# Altium PCB Main_Board.PcbDoc
Units mm, origin at the board's own origin, x right, y up, seen from the top; angles counter-clockwise.
Board outline 100 x 100 mm, 2 copper layers (Top Layer, Bottom Layer); 60 components, 76 nets, 295 pads, 66 vias.
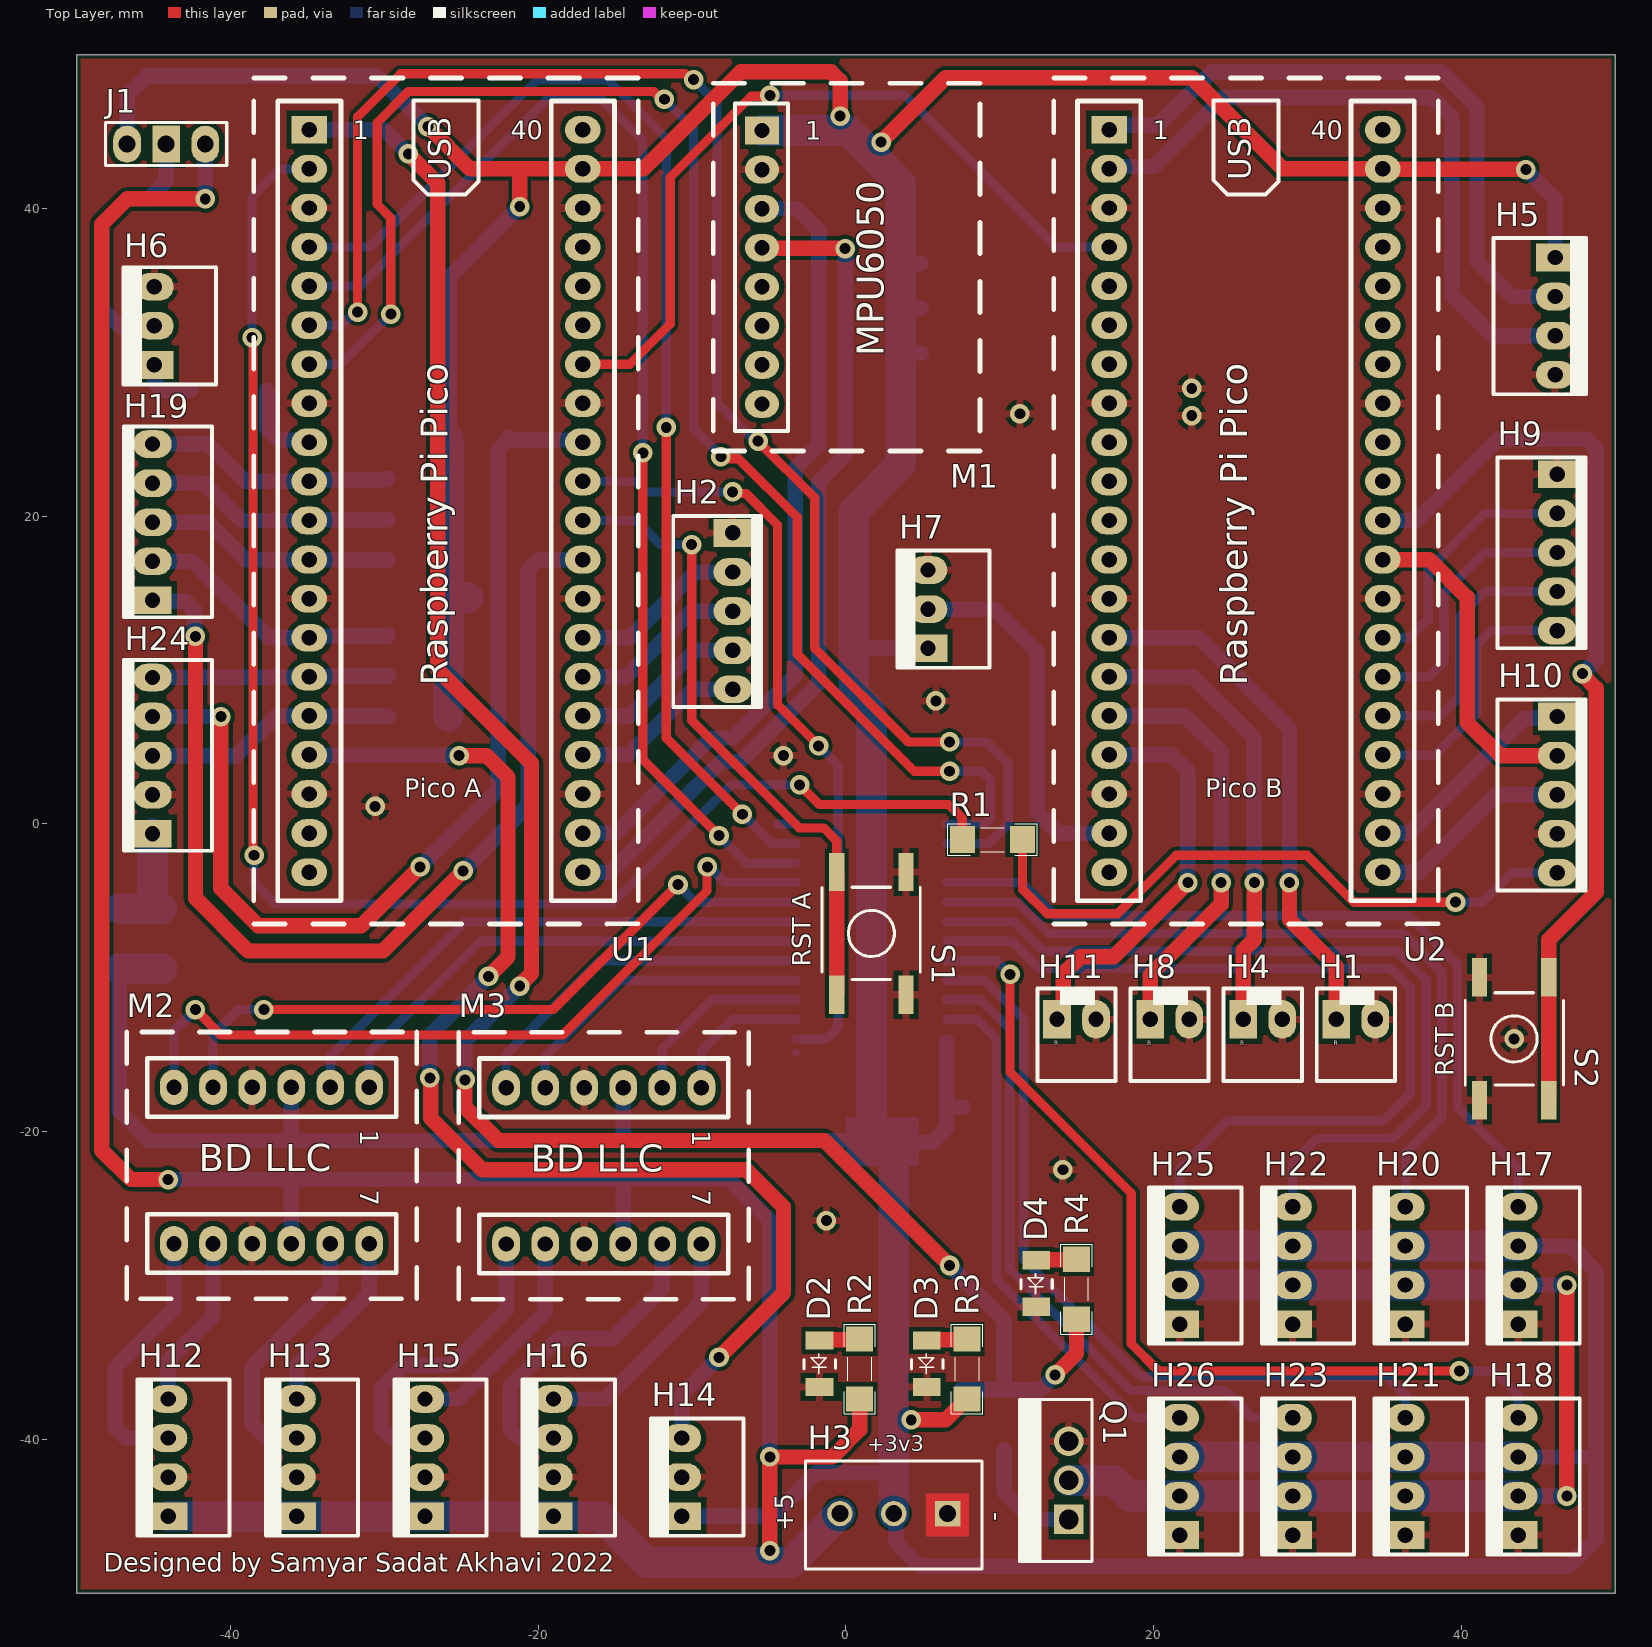
[diagram p0: Top Layer view]
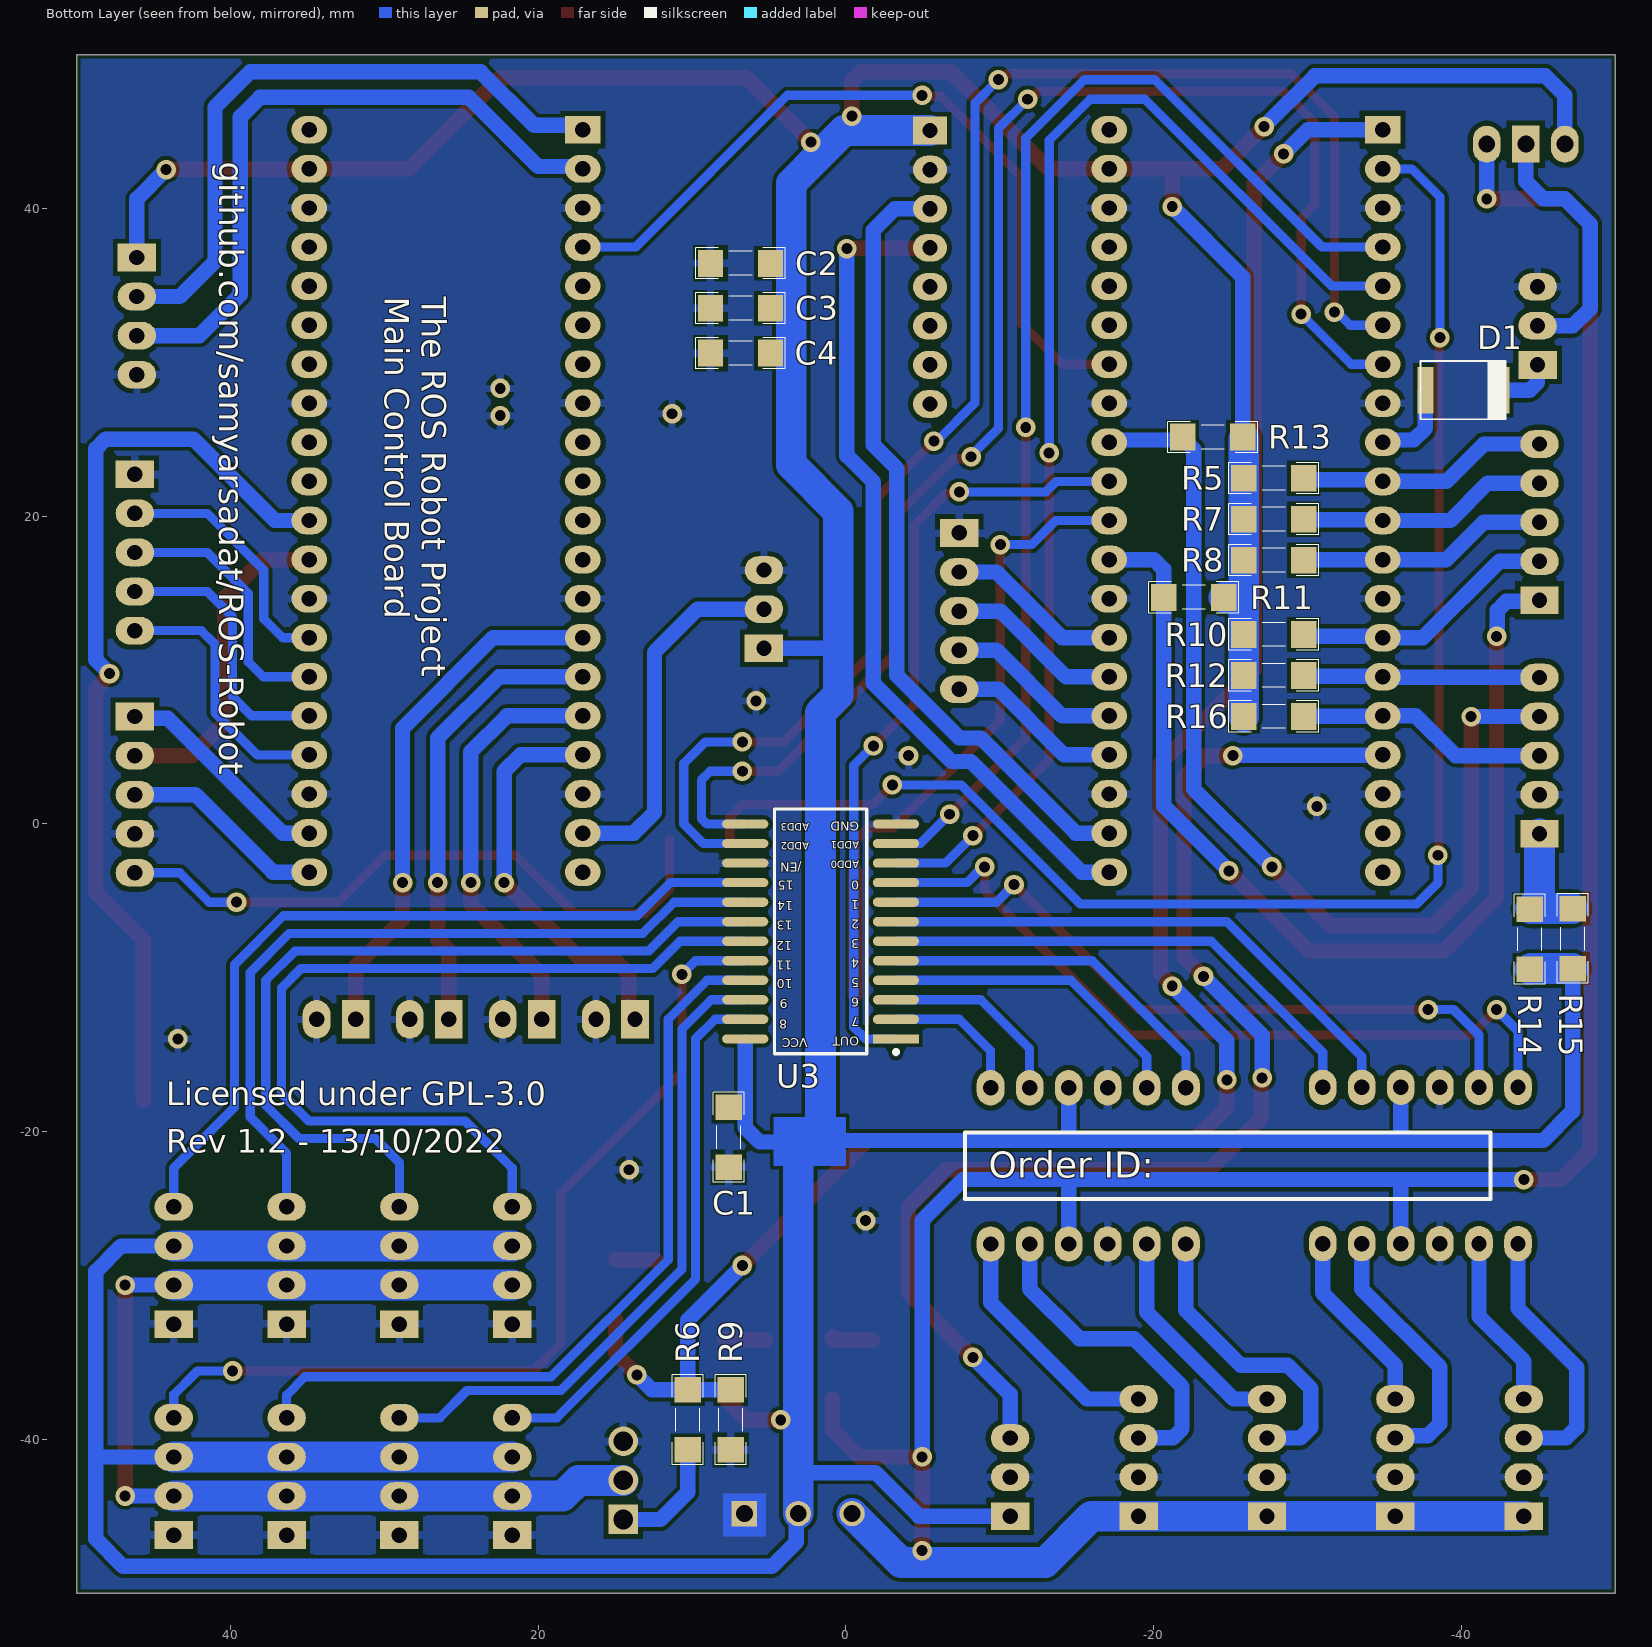
[diagram p1: Bottom Layer view, seen from below]
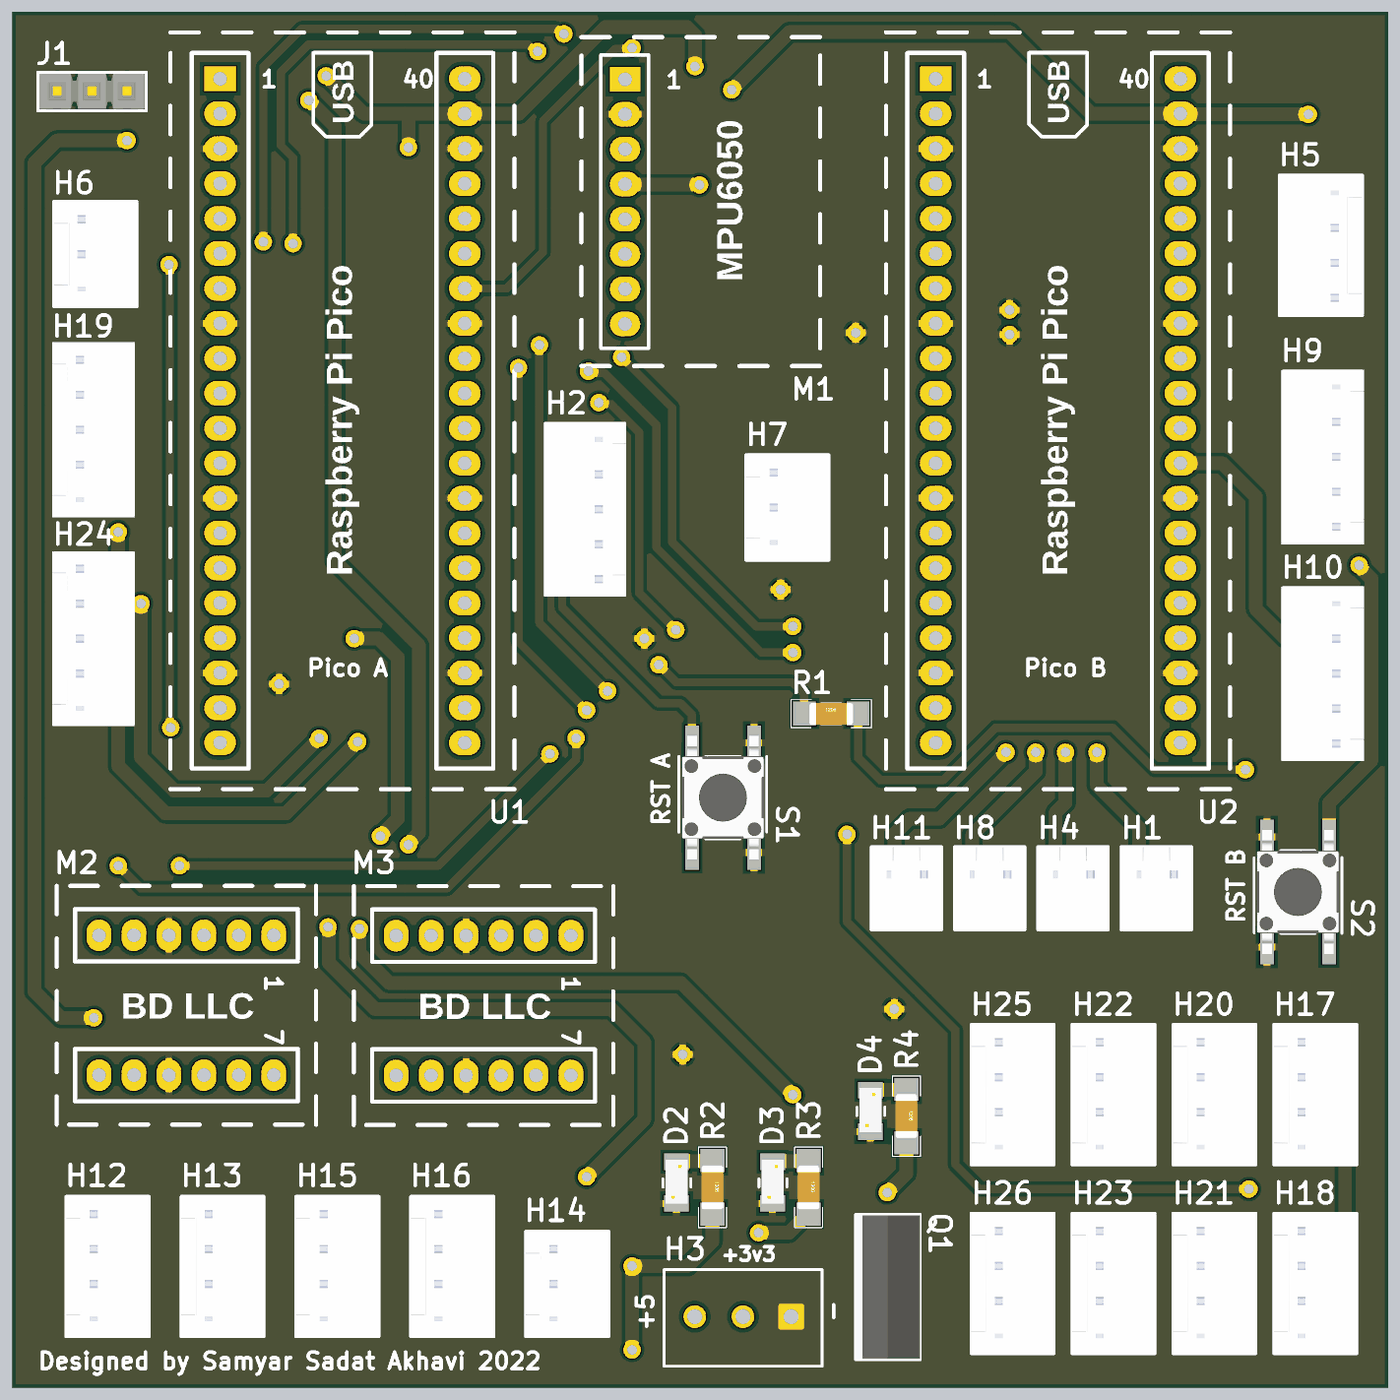
[diagram p2: 3D render of the assembled board from above, using the file's embedded part models]
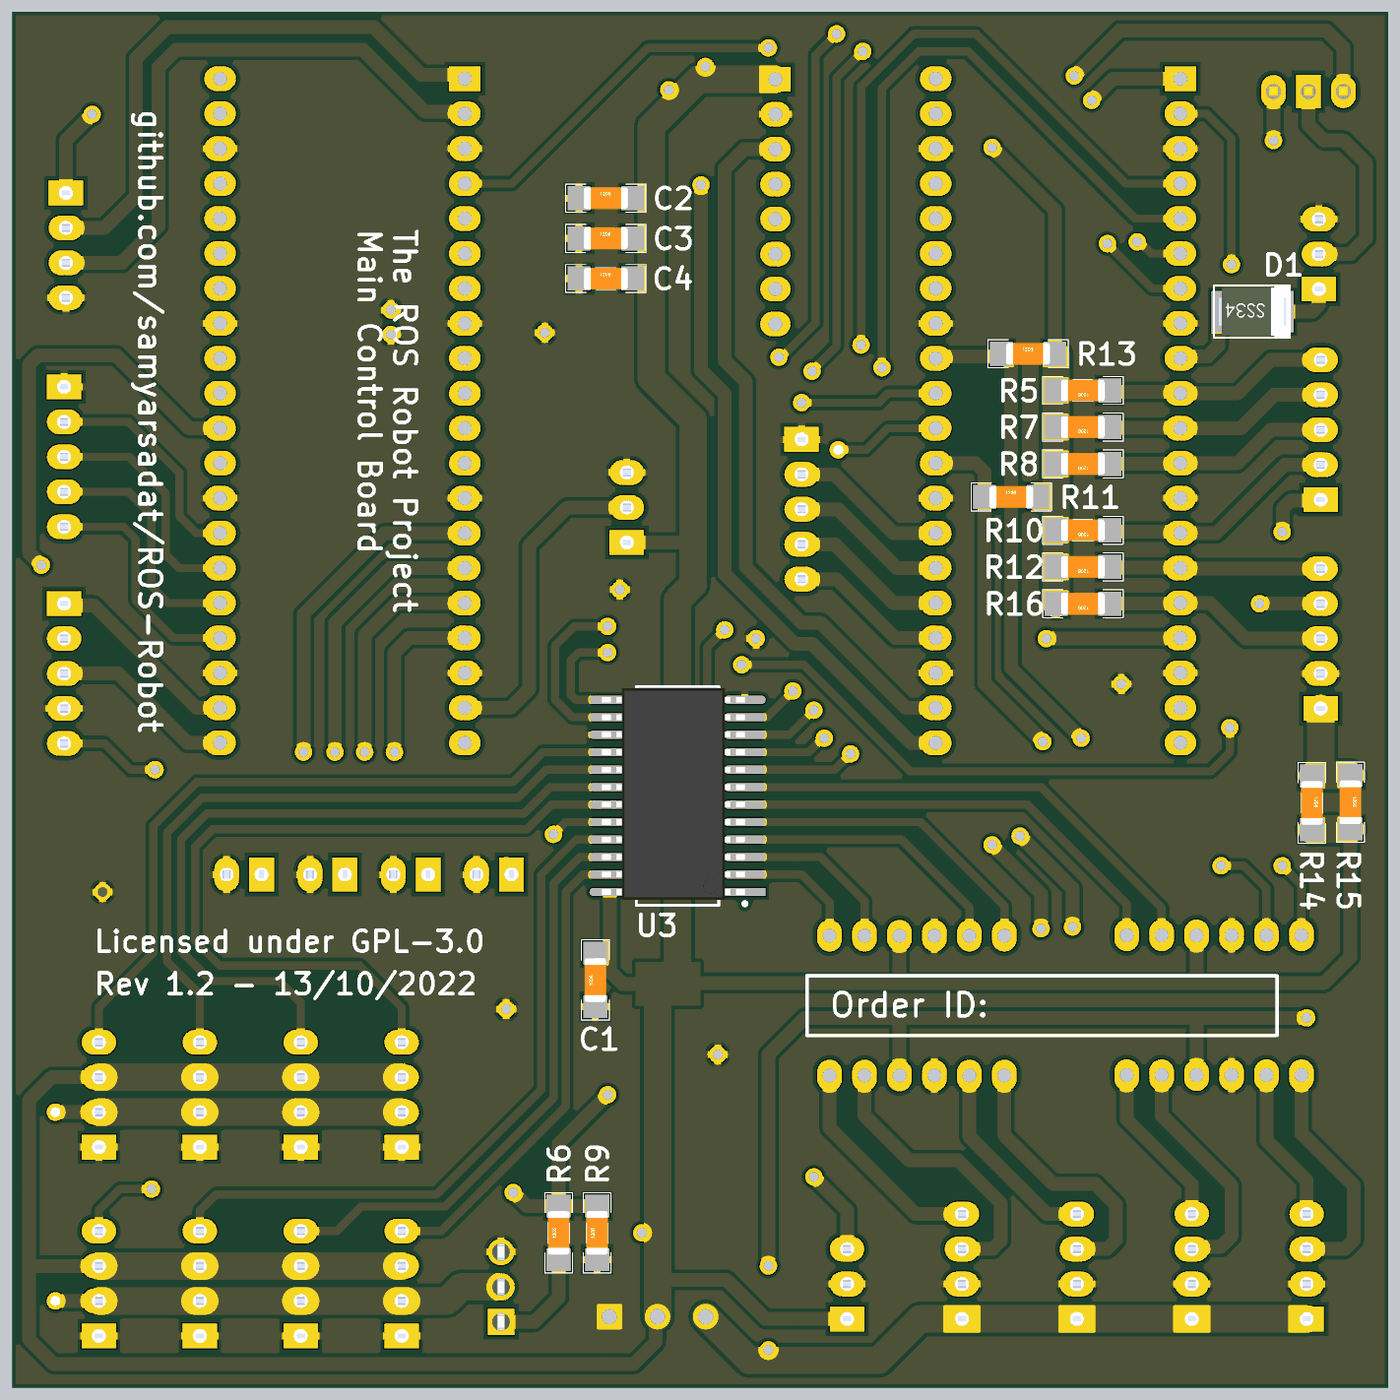
[diagram p3: 3D render of the assembled board from below, using the file's embedded part models]

## Layer stack, top to bottom
Top Solder: solder mask 0.0102, Solder Resist, Dk 3.5
Top Layer: signal copper 0.0356
Dielectric 1: dielectric 0.32, FR-4, Dk 4.8
Bottom Layer: signal copper 0.0356
Bottom Solder: solder mask 0.0102, Solder Resist, Dk 3.5

## Board outline
-50,-50 50,-50 50,50 -50,50

## Design rules (kind name [scope] priority, off if disabled: settings)
BoardOutlineClearance [All] p1: gap=0.254 ignorepadtopadclearanceinfootprint=FALSE
Clearance [All] p1: gap=0.254 ignorepadtopadclearanceinfootprint=FALSE except(0: Arc-Hole Track-Hole SMDPad-Hole Fill-Hole Poly-Hole Region-Hole Text-Hole; 0.33: Arc-THPad Track-THPad THPad-Fill THPad-Poly THPad-Region; 0.5: THPad-THPad THPad-Hole Via-Hole)
HoleSize [All] p1: absolutevalues=TRUE maxlimit=6.3 minlimit=0.2 maxpercent=80.000 minpercent=20.000
HoleToHoleClearance [All] p1: gap=0.5 allowstackedmicrovias=TRUE
PlaneConnect [All] p1: planeconnectstyle=Relief reliefexpansion=0.508 reliefentries=4 reliefconductorwidth=0.5 reliefairgap=0.3
PolygonConnect [All] p1: connectstyle=Relief reliefconductorwidth=0.5 reliefentries=4 polygonreliefangle="90 Angle" airgapwidth=0.3
RoutingVias [All] p1: holewidth=0.711 width=1.27 viastyle="Through Hole" minholewidth=0.2 minwidth=0.4 maxholewidth=0.711 maxwidth=1.27
SolderMaskExpansion [All] p1: expansion=0.102 istentingtop=FALSE
UnRoutedNet [All] p1: checkbadconnections=TRUE
Width [All] p1: maxlimit=2 minlimit=0.6 preferedwidth=1
26 further rules are at their usual default settings.

## Components (designator, comment, footprint, x,y, rotation, side; value= is the part's Value field where it differs from the comment)
C1 "104" CAP_SMD_1206 7.62,-20.365 r90 bottom
C2 "104" CAP_SMD_1206 6.858,36.449 r180 bottom
C3 "104" CAP_SMD_1206 6.858,33.528 r180 bottom
C4 "104" CAP_SMD_1206 6.858,30.607 r180 bottom
D1 "1N5822" DIODE_SS34 -40.132,28.194 r90 bottom
D2 "LED" LED_1206 -1.778,-35.052 r90 top
D3 "LED" LED_1206 5.207,-35.052 r90 top
D4 "LED" LED_1206 12.319,-29.845 r90 top
H1 "Header 2" MOKHABERATI2 33.147,-12.7 r0 top
H2 "Header 5" mokhaberati5 -7.366,18.923 r270 top
H3 "3 Pin Terminal" "Terminal 3" 6.604,-44.831 r180 top
H4 "Header 2" MOKHABERATI2 27.093,-12.7 r0 top
H5 "Header 4" mokhaberati4 46.101,36.83 r270 top
H6 "Header 3" mokhaberati3 -44.958,29.845 r90 top
H7 "Header 3" mokhaberati3 5.334,11.43 r90 top
H8 "Header 2" MOKHABERATI2 21.04,-12.7 r0 top
H9 "Header 5" mokhaberati5 46.228,22.733 r270 top
H10 "Header 5" mokhaberati5 46.228,6.985 r270 top
H11 "Header 2" MOKHABERATI2 14.986,-12.7 r0 top
H12 "Header 4" mokhaberati4 -44.069,-45 r90 top
H13 "Header 4" mokhaberati4 -35.719,-45 r90 top
H14 "Header 3" mokhaberati3 -10.668,-45 r90 top
H15 "Header 4" mokhaberati4 -27.368,-45 r90 top
H16 "Header 4" mokhaberati4 -19.018,-45 r90 top
H17 "Header 4" mokhaberati4 43.699,-32.512 r90 top
H18 "Header 4" mokhaberati4 43.699,-46.228 r90 top
H19 "Header 5" mokhaberati5 -45.085,14.541 r90 top
H20 "Header 4" mokhaberati4 36.366,-32.512 r90 top
H21 "Header 4" mokhaberati4 36.366,-46.228 r90 top
H22 "Header 4" mokhaberati4 29.032,-32.512 r90 top
H23 "Header 4" mokhaberati4 29.032,-46.228 r90 top
H24 "Header 5" mokhaberati5 -45.085,-0.635 r90 top
H25 "Header 4" mokhaberati4 21.699,-32.512 r90 top
H26 "Header 4" mokhaberati4 21.699,-46.228 r90 top
J1 "Jumper 3" "Jumper Selector" -41.656,44.196 r180 top
M1 "MPU 6050" "MPU6050 Module" -5.461,36.2 r0 top
M2 "BD LLC" "Bi-directional logic level coverter" -37.338,-22.2 r270 top
M3 "BD LLC" "Bi-directional logic level coverter" -15.748,-22.225 r270 top
Q1 "IRF540N" TO254P469X1042X1967-3P 14.478,-45.212 r90 top
R1 "220" RES_1206_new 9.525,-1.016 r0 top
R2 "430" RES_1206_new 0.889,-35.433 r270 top
R3 "220" RES_1206_new 7.874,-35.433 r270 top
R4 "220" RES_1206_new 14.986,-30.253 r270 top
R5 "4.7K" res_1206_new -27.813,22.479 r0 bottom
R6 "220" res_1206_new 10.287,-38.735 r90 bottom
R7 "4.7K" res_1206_new -27.813,19.812 r0 bottom
R8 "4.7K" res_1206_new -27.813,17.145 r0 bottom
R9 "10K" res_1206_new 7.493,-38.735 r90 bottom
R10 "4.7K" res_1206_new -27.813,12.319 r0 bottom
R11 "4.7K" res_1206_new -22.606,14.732 r180 bottom
R12 "4.7K" res_1206_new -27.813,9.652 r0 bottom
R13 "4.7K" res_1206_new -23.831,25.146 r180 bottom
R14 "180" res_1206_new -44.45,-7.493 r270 bottom
R15 "180" res_1206_new -47.244,-7.448 r270 bottom
R16 "4.7K" res_1206_new -27.813,6.985 r0 bottom
S1 "Push_Button" pUSH_bUttOn_4pin_smd 1.651,-7.112 r270 top
S2 "Push_Button" pUSH_bUttOn_4pin_smd 43.434,-13.97 r90 top
U1 "Raspberry Pi Pico" "Raspberry Pi Pico" -26,21 r0 top
U2 "Raspberry Pi Pico" "Raspberry Pi Pico" 26,21 r0 top
U3 "4067" 4067_SMD 1.651,-6.985 r0 bottom

## Footprints (in the part's own frame and the unit in brackets; to place one, negate y for a bottom-side part, rotate by r counter-clockwise, add the part's x,y. Pads: shape width x height; smd on the part's side, far side on the other; paste and mask are expansions set on the pad)
4067_SMD [mm] "www.Pishnam.com"
  rect 3x0.6 smd: 1(-4.9,6.985)
  oval 3x0.6 smd: 2(-4.9,5.715) 3(-4.9,4.445) 4(-4.9,3.175) 5(-4.9,1.905) 6(-4.9,0.635) 7(-4.9,-0.635) 8(-4.9,-1.905) 9(-4.9,-3.175) 10(-4.9,-4.445) 11(-4.9,-5.715) 12(-4.9,-6.985) 13(4.9,-6.985) 14(4.9,-5.715) 15(4.9,-4.445) 16(4.9,-3.175) 17(4.9,-1.905) 18(4.9,-0.635) 19(4.9,0.635) 20(4.9,1.905) 21(4.9,3.175) 22(4.9,4.445) 23(4.9,5.715) 24(4.9,6.985)
  Top Layer circle w0.25: c-4.9,7.884 r0.125
  silkscreen extent -5.02,-7.95 3,7.96, body extent -4.9,-7.83 5.5,7.57, height 2.6
"Bi-directional logic level coverter" [mm] "Bi-directional logic level coverter"
  oval 2.3x1.8 hole 1: 1(-5.08,6.35) 2(-5.08,3.81) 3(-5.08,1.27) 4(-5.08,-1.27) 5(-5.08,-3.81) 6(-5.08,-6.35) 7(5.08,6.35) 8(5.08,3.81) 9(5.08,1.27) 10(5.08,-1.27) 11(5.08,-3.81) 12(5.08,-6.35)
  silkscreen extent -8.68,-9.43 8.68,9.43
CAP_SMD_1206 [mm]
  rect 1.65x1.75 smd: 1(-1.95,0) 2(1.95,0)
  silkscreen extent -2.92,-1.02 2.92,1.02, body extent -1.6,-0.8 1.6,0.8, height 1
DIODE_SS34 [mm]
  rect 3x1.05 smd: 1(0,2.468) 2(0,-2.468)
  silkscreen extent -1.88,-2.73 1.92,2.79, body extent -1.75,-2.47 1.75,2.43, height 2.11
"Jumper Selector" [mm]
  oval 1.8x2.4 hole 1.1: 1(0,0) 3(5.08,0)
  rect 1.8x2.4 hole 1.1: 2(2.54,0)
  silkscreen extent -1.4,-1.4 6.48,1.4, body extent -1.27,-1.29 6.35,1.27, height 10.16
LED_1206 [mm]
  rect 1.2x1.8 smd: 1(1.473,-0.051) 2(-1.549,-0.051)
  silkscreen extent -0.7,-1.09 0.6,0.94, body extent -1.57,-0.86 1.63,0.74, height 1.11
MOKHABERATI2 [mm] "www.Pishnam.com"
  rect 1.8x2.5 hole 1: 1(-1.27,0)
  oval 1.8x2.5 hole 1: 2(1.27,0)
  silkscreen extent -2.54,-4 2.54,2, body extent -2.54,-4 2.54,2, height 11
mokhaberati3 [mm]
  rect 1.8x2.5 hole 1: 1(0,0)
  oval 1.8x2.5 hole 1: 2(2.54,0) 3(5.08,0)
  silkscreen extent -1.27,-4 6.35,2, body extent -1.27,-4 6.35,2, height 11
mokhaberati4 [mm] "www.Pishnam.com"
  rect 1.8x2.5 hole 1: 1(0,0)
  oval 1.8x2.5 hole 1: 2(2.54,0) 3(5.08,0) 4(7.62,0)
  silkscreen extent -1.28,-4 8.89,2, body extent -1.27,-4 8.89,2, height 11
mokhaberati5 [mm] "www.Pishnam.com"
  rect 1.8x2.5 hole 1: 1(0,0)
  oval 1.8x2.5 hole 1: 2(2.54,0) 3(5.08,0) 4(7.62,0) 5(10.16,0)
  silkscreen extent -1.18,-3.86 11.33,1.88, body extent -1.27,-4 11.43,2, height 11
"MPU6050 Module" [mm] "MPU6050 Module"
  rect 2.2x1.8 hole 1: 1(0,8.885)
  oval 2.2x1.8 hole 1: 2(0,6.345) 3(0,3.805) 4(0,1.265) 5(0,-1.275) 6(0,-3.815) 7(0,-6.355) 8(0,-8.895)
  silkscreen extent -3.18,-11.95 14.18,11.95
pUSH_bUttOn_4pin_smd [mm]
  rect 2.5x1 smd: 1(-3.992,2.25) 1(3.993,2.25) 2(-3.992,-2.25) 2(3.993,-2.25)
  silkscreen extent -3,-3.2 3,3.17, body extent -4.5,-3 4.5,3, height 5
"Raspberry Pi Pico" [mm] "Raspberry Pi Pico"
  rect 2.3x1.8 hole 1: 1(-8.89,24.13)
  oval 2.3x1.8 hole 1: 2(-8.89,21.59) 3(-8.89,19.05) 4(-8.89,16.51) 5(-8.89,13.97) 6(-8.89,11.43) 7(-8.89,8.89) 8(-8.89,6.35) 9(-8.89,3.81) 10(-8.89,1.27) 11(-8.89,-1.27) 12(-8.89,-3.81) 13(-8.89,-6.35) 14(-8.89,-8.89) 15(-8.89,-11.43) 16(-8.89,-13.97) 17(-8.89,-16.51) 18(-8.89,-19.05) 19(-8.89,-21.59) 20(-8.89,-24.13) 21(8.89,-24.13) 22(8.89,-21.59) 23(8.89,-19.05) 24(8.89,-16.51) 25(8.89,-13.97) 26(8.89,-11.43) 27(8.89,-8.89) 28(8.89,-6.35) 29(8.89,-3.81) 30(8.89,-1.27) 31(8.89,1.27) 32(8.89,3.81) 33(8.89,6.35) 34(8.89,8.89) 35(8.89,11.43) 36(8.89,13.97) 37(8.89,16.51) 38(8.89,19.05) 39(8.89,21.59) 40(8.89,24.13)
  silkscreen extent -12.5,-27.5 12.5,27.5
RES_1206_new [mm]
  rect 1.65x1.75 smd: 1(-1.95,0) 2(1.95,0)
  silkscreen extent -2.92,-1.02 2.92,1.02, body extent -1.6,-0.8 1.6,0.8, height 1
res_1206_new [mm]
  rect 1.65x1.75 smd: 1(-1.95,0) 2(1.95,0)
  silkscreen extent -2.92,-1.02 2.92,1.02, body extent -1.6,-0.8 1.6,0.8, height 1
"Terminal 3" [mm] "3 Pin terminal"
  rect 1.65x1.65 hole 1.1: 1(0,0)
  round 1.65 hole 1.1: 2(3.5,0) 3(7,0)
  silkscreen extent -2.25,-3.42 9.23,3.6
TO254P469X1042X1967-3P [mm]
  rect 1.92x1.92 hole 1.28: 1(0,0)
  round 1.92 hole 1.28: 2(2.54,0) 3(5.08,0)
  silkscreen extent -2.74,-1.5 7.81,3.19, body extent -2.67,-1.5 7.75,3.19, height 18.84

## Part data
C1 C2 C3 C4: library part adasi, "Capacitor", طراحی توسط="مهندس محمد رفیعی", وب سایت=www.Pishnam.com, کانال تلگرام=@Pishnam
D1: "Schottky Diode", طراحی توسط="مهندس محمد رفیعی", وب سایت=www.Pishnam.com, کانال تلگرام=@Pishnam
D2 D3: "Orange LED", طراحی توسط="مهندس محمد رفیعی", وب سایت=www.Pishnam.com, کانال تلگرام=@Pishnam
D4: "Blue LED", طراحی توسط="مهندس محمد رفیعی", وب سایت=www.Pishnam.com, کانال تلگرام=@Pishnam
H1 H4 H8 H11: "Header, 2-Pin", طراحی توسط="مهندس محمد رفیعی", وب سایت=www.Pishnam.com, کانال تلگرام=@Pishnam
H3: library part "Terminal 3"
H5 H12 H13 H15 H16 H17 H18 H20 H21 H22 H23 H25 H26: "Header, 4-Pin", طراحی توسط="مهندس محمد رفیعی", وب سایت=www.Pishnam.com, کانال تلگرام=@Pishnam
H6 H7 H14: "Header, 3-Pin", طراحی توسط="مهندس محمد رفیعی", وب سایت=www.Pishnam.com, کانال تلگرام=@Pishnam
J1: "3 Pin jumper"
M1: "MPU 6050 module"
M2 M3: library part "Logic Level Converter", "Bi-directional 4 channel logic level converter"
Q1: "MOSFET (N-Channel)", Manufacturer_Name=Infineon, Datasheet Link=http://uk.rs-online.com/web/p/products/3713068, Height=4.69mm, Manufacturer_Part_Number=IRF540N
R1 R2 R3 R4 R5 R6 R7 R8 R9 R10 R11 R12 R13 R14 R15 R16: library part Resistor, "Resistor", طراحی توسط="مهندس محمد رفیعی", وب سایت=www.Pishnam.com, کانال تلگرام=@Pishnam
U1 U2: "The Raspberry Pi Pico board containing the RP2040 microcontroller"
U3: "Analog Multiplexer/Demultiplexer", طراحی توسط="مهندس محمد رفیعی", وب سایت=www.Pishnam.com, کانال تلگرام=@Pishnam
H2 H9 H10 H19 H24 S1 S2: طراحی توسط="مهندس محمد رفیعی", وب سایت=www.Pishnam.com, کانال تلگرام=@Pishnam

## Via types
v1: diameter 1.27, hole 0.711, Top Layer to Bottom Layer, 66 vias

## Nets (pads, with @x,y where several pads share a name; then routed paths per layer and width w, separated by ;. In a path a pad name is that pad's centre, name@x,y a point inside that pad or via, vN(x,y) a via of type N, cw(c..) or ccw(c..) an arc to the next point about the centre after c; other vN are vias at no path point)
+3v3: C1.2 C2.2 C3.2 C4.2 H3.2 H5.1 H7.1 H14.1 H17.3 H18.3 H20.3 H21.3 H22.3 H23.3 H25.3 H26.3 J1.3 M1.1 M2.3 M3.3 R3.2 R5.2 R7.2 R8.2 R10.2 R11.2 R12.2 R13.2 R14.2 R15.2 R16.2 U1.39 U2.39 U3.24 | length 478.2
  Top Layer w1: v1(-27.178,45.339) -24.429,42.59 U1.39 -13.163,42.59 -6.858,48.895 -0.967,48.895 -0.381,48.309 v1(-0.381,46.017) ; v1(-21.209,40.132) -21.209,42.545 ; v1(2.286,44.323) 6.477,48.514 22.479,48.514 28.403,42.59 U2.39 34.913,42.567 44.174,42.567 v1(44.196,42.545) ; v1(4.241,-38.735) 6.472,-38.735 7.824,-37.383 R3.2
  Bottom Layer w1: R15.2 -47.244,-18.669 -45.339,-20.574 -36.068,-20.574 ; J1.3 -46.736,47.371 -45.466,48.641 -30.48,48.641 v1(-27.178,45.339) ; M2.3 -36.068,-20.574 ; R13.2 -25.781,35.56 v1(-21.209,40.132) ; M3.3 -14.478,-20.574 ; H14.1 -4.741,-45 -1.905,-42.164 3.104,-42.164 ; 0.508,11.43 H7.1 ; 2.349,-20.637 2.786,-20.637 3.104,-20.955 3.383,-20.676 5.613,-20.676 6.551,-19.738 6.551,-18.415 ; 2.667,-20.574 1.651,-20.574 -14.478,-20.574 ; H3.2 3.228,-44.955 3.228,-46.662 4.826,-48.26 46.99,-48.26 48.768,-46.482 48.768,-29.083 47.117,-27.432 H17.3 ; 3.104,-38.735 v1(4.241,-38.735) ; 3.556,30.607 C4.2 ; 3.556,33.528 C3.2 ; 3.556,36.449 C2.2 ; U3.24@6.551,-14.17 6.551,-18.415 ; C1.2 6.551,-18.415 ; H18.3 48.768,-41.148 ; v1(44.196,42.545) 46.101,40.64 H5.1 ; -36.068,-20.574 -14.478,-20.574
  Bottom Layer w2: R15.2 -44.495,-9.398 R14.2 ; R16.2 R12.2 R10.2 -25.863,14.732 ; R13.2@-25.863,25.064 R5.2 R7.2 R8.2 -25.863,14.732 ; R11.2 -25.863,14.732 ; M1.1 -0.381,45.085 ; 0.127,45.085 1.587,43.625 ; 1.651,-20.574 1.651,7.239 0.508,8.382 0.508,11.43 0.508,20.32 3.556,23.368 3.556,30.607 3.556,33.528 3.556,36.449 3.556,41.656 1.714,43.498 ; H3.2 3.104,-42.164 3.104,-38.735 3.104,-20.955 3.104,-20.701 ; H26.3 H23.3 H21.3 H18.3 ; H25.3 H22.3 H20.3 H17.3
+5: H3.3 H12.1 H13.1 H15.1 H16.1 J1.1 M2.9 M3.9 R2.2 | length 201.2
  Top Layer w1: v1(-44.069,-23.114) -46.482,-23.114 -48.387,-21.209 -48.387,38.989 -46.736,40.64 v1(-41.656,40.64) ; v1(-4.953,-47.244) v1(-4.953,-41.148) -0.889,-41.148 0.889,-39.37 R2.2
  Bottom Layer w1: v1(-44.069,-23.114) -36.068,-23.114 ; v1(-41.656,40.64) J1.1 ; M2.9 -36.068,-23.114 ; M3.9 -14.478,-23.114 ; v1@-5.08,-47.371 v1(-4.953,-47.244) ; v1(-4.953,-41.148) -4.953,-25.781 -7.62,-23.114 -14.478,-23.114 ; -36.068,-23.114 -14.478,-23.114
  Bottom Layer w2: H12.1 H13.1 H15.1 H16.1 -15.96,-45 -12.954,-48.006 -5.08,-48.006 ; -4.953,-48.006 -3.571,-48.006 H3.3
A_SCL: M1.3 U1.22 | length 51.9
  Bottom Layer w1: U1.22 -14.941,-0.59 -8.763,5.588 -7.366,5.588 -3.302,9.652 -3.302,23.114 -1.778,24.638 -1.778,38.608 -3.175,40.005 M1.3
A_SDA: M1.4 U1.21 | length 54.8
  Top Layer w1: M1.4 -5.434,37.438 -0.081,37.438 v1(-0.054,37.411)
  Bottom Layer w1: U1.21 -15.322,-3.13 -8.128,4.064 -6.858,4.064 -1.778,9.144 -1.778,22.225 -0.054,23.949 v1(-0.054,37.411)
B_SCL: H5.3 U2.2 | length 44.1
  Bottom Layer w1: U2.2 17.263,42.743 20.01,42.743 24.511,47.244 38.1,47.244 39.37,45.974 39.37,34.417 42.037,31.75 H5.3
B_SDA: H5.2 U2.1 | length 42.5
  Bottom Layer w1: U2.1 17.394,45.414 20.268,45.414 23.749,48.895 38.735,48.895 41.021,46.609 41.021,36.576 43.307,34.29 H5.2
BL_ENC_A: H19.2 R10.1 U1.14 | length 17.5
  Bottom Layer w1: H19.2 -42.481,17.081 -37.51,12.11 U1.14 -34.786,12.214 -29.867,12.214 R10.1
BL_ENC_B: H19.3 R8.1 U1.12 | length 16.3
  Bottom Layer w1: H19.3 -41.465,19.621 -39.034,17.19 U1.12 -34.867,17.167 -29.785,17.167 R8.1
BL_MS: H11.1 U2.17 | length 27.4
  Top Layer w1: H11.1 14.116,-12.3 14.116,-9.76 15.24,-8.636 17.399,-8.636 v1(22.225,-3.81)
  Bottom Layer w1: H11.1 14.116,-12.3 H11.1@14.116,-11.919 ; U2.17 21.164,4.49 22.225,3.429 v1(22.225,-3.81)
BR_ENC_A: H24.3 R16.1 U1.16 | length 16.4
  Bottom Layer w1: H24.3 -39.624,4.445 -37.039,7.03 U1.16 -34.867,7.007 -29.785,7.007 R16.1
BR_ENC_B: H24.4 R13.1 U1.32 | length 66.5
  Top Layer w1: v1(-40.64,6.985) -40.64,-4.191 -38.227,-6.604 -31.496,-6.604 v1(-27.686,-2.794)
  Bottom Layer w1: H24.4 v1(-40.64,6.985) ; v1(-27.686,-2.794) -22.606,2.286 -22.606,24.371 R13.1@-22.014,24.963 ; R13.1 -21.881,25.096 R13.1@-22.014,24.963 ; U1.32 -17.263,24.963 R13.1@-22.014,24.963
BR_MS: H8.1 U2.16 | length 27.5
  Top Layer w1: H8.1 19.77,-9.821 24.384,-5.207 v1(24.384,-3.81)
  Bottom Layer w1: U2.16 22.053,7.03 24.384,4.699 v1(24.384,-3.81)
CAM_LED_1: H9.2 U2.27 | length 16.5
  Bottom Layer w0.6: U2.27 36.621,12.11 37.846,13.335 37.846,16.51 41.529,20.193 H9.2
CAM_LED_2: H9.3 U2.26 | length 17.3
  Bottom Layer w0.6: U2.26 37.891,9.57 38.862,10.541 38.862,14.986 41.529,17.653 H9.3
CAM_LED_3: H9.4 U2.25 | length 17.7
  Bottom Layer w0.6: U2.25 38.653,7.03 39.878,8.255 39.878,13.462 41.529,15.113 H9.4
CAM_LED_4: H9.5 U2.24 | length 17.3
  Bottom Layer w0.6: U2.24 38.272,4.49 41.021,7.239 41.021,11.684 41.91,12.573 H9.5
ENV_SENS: H7.2 U2.19 | length 23.9
  Bottom Layer w1: H7.2 9.652,13.97 12.446,11.176 12.446,0.762 13.798,-0.59 U2.19
ES_1: H17.4 U3.16 | length 52.8
  Bottom Layer w0.6: U3.16 11.43,-3.81 13.589,-5.969 36.576,-5.969 39.751,-9.144 39.751,-18.415 43.699,-22.363 H17.4
ES_2: H20.4 U3.17 | length 50.3
  Bottom Layer w0.6: U3.17 11.176,-5.08 13.208,-7.112 36.195,-7.112 38.735,-9.652 38.735,-19.05 36.366,-21.419 H20.4
ES_3: H22.4 U3.18 | length 54
  Bottom Layer w0.6: U3.18 10.922,-6.35 12.827,-8.255 35.814,-8.255 37.719,-10.16 37.719,-18.288 35.56,-20.447 30.607,-20.447 29.032,-22.022 H22.4
ES_4: H25.4 U3.19 | length 57.8
  Bottom Layer w0.6: U3.19 10.795,-7.62 12.573,-9.398 35.433,-9.398 36.703,-10.668 36.703,-17.526 34.925,-19.304 24.765,-19.304 21.699,-22.37 H25.4
ES_5: H18.4 U3.20 | length 59.8
  Top Layer w0.6: v1(10.668,-9.779) 10.668,-16.129 18.542,-24.003 18.542,-33.782 20.32,-35.56 v1(39.878,-35.56)
  Bottom Layer w0.6: U3.20 9.779,-8.89 v1(10.668,-9.779) ; v1(39.878,-35.56) 42.164,-35.56 43.699,-37.095 H18.4
ES_6: H21.4 U3.21 | length 51.6
  Bottom Layer w0.6: U3.21 9.017,-10.16 11.557,-12.7 11.557,-28.321 19.177,-35.941 35.179,-35.941 36.366,-37.128 H21.4
ES_7: H23.4 U3.22 | length 42.9
  Bottom Layer w0.6: U3.22 8.763,-11.43 10.668,-13.335 10.668,-28.956 18.542,-36.83 24.638,-36.83 26.416,-38.608 H23.4
ES_8: H26.4 U3.23 | length 35
  Bottom Layer w0.6: U3.23 8.509,-12.7 9.779,-13.97 9.779,-29.591 18.796,-38.608 H26.4
ES_EN: H17.2 H18.2 H20.2 H21.2 H22.2 H23.2 H25.2 H26.2 Q1.2 | length 71.7
  Top Layer w1: v1(46.863,-43.688) v1(46.863,-29.972)
  Bottom Layer w1: H18.2 v1(46.863,-43.688) ; H17.2 v1(46.863,-29.972)
  Bottom Layer w2: Q1.2 17.399,-42.672 18.415,-43.688 H26.2 H23.2 H21.2 H18.2 ; H25.2 H22.2 H20.2 H17.2
ES_EN_SIG: R4.2 R6.2 R9.2 U1.1 | length 130.2
  Top Layer w1: v1(-28.448,43.561) -26.543,41.656 -26.543,10.033 -20.447,3.937 -20.447,-9.706 -21.209,-10.468 v1(-21.209,-10.541) ; v1(-24.765,-16.637) -24.765,-18.415 -22.606,-20.574 -1.397,-20.574 v1(6.731,-28.702) ; v1(13.589,-35.814) 14.986,-34.417 R4.2
  Bottom Layer w1: U1.1 -30.017,45.13 v1(-28.448,43.561) ; v1(-24.765,-16.637) -24.765,-14.097 v1(-21.209,-10.541) ; v1(6.731,-28.702) 10.287,-32.258 R6.2 ; R9.2 R6.2 ; v1(13.589,-35.814) 12.618,-36.785 R6.2
FL_ENC_A: H19.4 R7.1 U1.11 | length 16.4
  Bottom Layer w1: H19.4 -41.719,22.161 -39.288,19.73 U1.11 -34.849,19.771 -29.804,19.771 R7.1
FL_ENC_B: H19.5 R5.1 U1.10 | length 16.4
  Bottom Layer w1: H19.5 -41.465,24.701 -39.034,22.27 U1.10 -34.786,22.374 -29.867,22.374 R5.1
FL_MS: H4.1 U2.15 | length 29.7
  Top Layer w1: H4.1 25.823,-8.213 26.543,-7.493 v1(26.543,-3.81)
  Bottom Layer w1: U2.15 22.561,9.57 26.543,5.588 v1(26.543,-3.81)
FP_LED: R1.1 U1.2 | length 101.2
  Top Layer w0.6: v1(-38.608,31.623) -38.544,31.56 -38.544,-1.968 v1(-38.481,-2.032) ; v1(-3.009,2.54) -1.739,1.27 6.691,1.27 7.554,0.408 7.554,-0.995 R1.1
  Bottom Layer w0.6: v1(-38.608,31.623) -38.608,40.767 -36.785,42.59 U1.2 ; v1(-38.481,-2.032) -38.481,-3.81 -37.084,-5.207 -15.24,-5.207 -7.493,2.54 v1(-3.009,2.54)
FR_ENC_A: H24.5 R12.1 U1.15 | length 15.4
  Bottom Layer w1: H24.5 -45.063,9.547 -34.913,9.547 U1.15 -34.849,9.611 -29.804,9.611 R12.1
FR_ENC_B: H19.1 R11.1 U1.29 | length 67.9
  Top Layer w1: v1(-42.291,12.192) -42.291,-4.826 -38.862,-8.255 -30.099,-8.255 v1(-24.892,-3.048)
  Bottom Layer w1: H19.1 -45.024,14.48 -42.928,14.48 -42.343,13.895 -42.343,12.244 v1(-42.291,12.192) ; v1(-24.892,-3.048) -20.656,1.188 R11.1 -20.656,16.555 -20.021,17.19 U1.29
FR_MS: H1.1 U2.14 | length 34.3
  Top Layer w1: v1(28.829,-3.81) 28.829,-6.223 31.877,-9.271 H1.1
  Bottom Layer w1: U2.14 22.942,12.11 28.829,6.223 v1(28.829,-3.81)
GND: C1.1 C2.1 C3.1 C4.1 D2.2 D3.2 D4.2 H1.2 H2.1 H3.1 H4.2 H5.4 H6.3 H7.3 H8.2 H9.1 H10.4 H11.2 H12.2 H13.2 H14.2 H15.2 H16.2 H17.1 H18.1 H20.1 H21.1 H22.1 H23.1 H24.2 H25.1 H26.1 M1.2 M2.4 M2.10 M3.4 M3.10 Q1.3 R9.1 S1.1 S2.1 U1.3 U1.8 U1.13 U1.18 U1.23 U1.28 U1.33 U1.38 U2.3 U2.8 U2.13 U2.18 U2.23 U2.28 U2.33 U2.38 U3.12 U3.15 | length 1.2
  Bottom Layer w0.6: U3.12@-4.449,0 U3.12
  other v1: -1.27,-25.781 14.097,-22.479 43.434,-13.97 -30.607,1.143 -4.064,4.445 5.842,8.001 22.479,26.543 11.303,26.67 22.479,28.321
L_MOTOR_A: H2.3 U1.26 | length 11.5
  Bottom Layer w1: U1.26 -14.306,9.57 -10.033,13.843 H2.3
L_MOTOR_B: H2.2 U1.27 | length 11.5
  Bottom Layer w1: U1.27 -14.052,12.11 -9.779,16.383 H2.2
MODE_SEL: H10.2 U2.29 | length 21.4
  Top Layer w1: U2.29 37.928,17.19 40.386,14.732 40.386,6.604 42.545,4.445 H10.2
MUX_A0: U1.5 U3.10 | length 80.8
  Top Layer w0.6: v1(-13.208,24.13) -13.208,4.191 v1(-8.255,-0.762)
  Bottom Layer w0.6: U1.5 -31.578,34.97 -19.431,47.117 -15.875,47.117 -13.208,44.45 v1(-13.208,24.13) ; v1(-8.255,-0.762) -6.477,-2.54 U3.10
MUX_A1: U1.4 U3.11 | length 79.6
  Top Layer w0.6: v1(-11.684,25.781) -11.684,5.588 v1(-6.731,0.635)
  Bottom Layer w0.6: U1.4 -30.943,37.51 -20.066,48.387 -15.494,48.387 -11.684,44.577 v1(-11.684,25.781) ; v1(-6.731,0.635) -4.826,-1.27 U3.11
MUX_A2: U1.6 U3.14 | length 103.7
  Top Layer w0.6: v1(-31.75,33.274) -31.75,45.974 -28.956,48.768 -10.468,48.768 -10.129,48.428 v1@-9.947,48.428 ; v1(-5.715,24.892) -2.032,21.209 -2.032,11.43 4.064,5.334 v1(6.731,5.334)
  Bottom Layer w0.6: U1.6 -32.775,32.43 -31.931,33.274 v1(-31.75,33.274) ; v1(-9.906,48.387) -8.382,46.863 -8.382,27.378 -5.896,24.892 v1(-5.715,24.892) ; U3.14 9.271,-1.27 10.541,0 10.541,3.937 9.144,5.334 v1(6.731,5.334)
MUX_A3: U1.7 U3.13 | length 100.8
  Top Layer w0.6: v1(-29.591,33.147) -29.591,39.397 -30.48,40.286 -30.48,45.593 -28.448,47.625 -12.5,47.625 -12.033,47.158 v1@-11.852,47.158 ; v1(-8.128,23.876) -8,23.748 -6.984,23.748 -3.175,19.939 -3.175,11.049 4.445,3.429 v1(6.731,3.429)
  Bottom Layer w0.6: U1.7 -32.848,29.89 v1(-29.591,33.147) ; v1(-11.811,47.117) -9.906,45.212 -9.906,25.709 -8.128,23.931 v1(-8.128,23.876) ; U3.13 9.047,0 9.398,0.351 9.398,2.867 8.836,3.429 v1(6.731,3.429)
MUX_IO: U1.31 U3.1 | length 51.2
  Top Layer w0.6: v1(-7.366,21.59) -7.262,21.486 -6.5,21.486 -4.445,19.431 -4.445,7.747 v1(-1.778,5.08)
  Bottom Layer w0.6: U1.31 -13.667,22.27 -12.987,21.59 v1(-7.366,21.59) ; U3.1 -1.27,-13.97 -0.508,-13.208 -0.508,3.81 v1(-1.778,5.08)
NetD1_2: D1.2 H6.1 | length 3.7
  Bottom Layer w1: H6.1 -44.958,28.702 -44.45,28.194 D1.2
NetD2_1: D2.1 R2.1 | length 2.7
  Top Layer w1: D2.1 -1.679,-33.531 0.841,-33.531 R2.1 ; R2.1@0.873,-33.34 R2.1@0.889,-33.356
NetD3_1: D3.1 R3.1 | length 2.7
  Top Layer w1: D3.1@5.273,-33.594 D3.1 5.306,-33.531 7.795,-33.531 7.858,-33.467 R3.1
NetD4_1: D4.1 R4.1 | length 2.6
  Top Layer w1: D4.1 12.404,-28.337 14.952,-28.337 R4.1
NetH6_2: H6.2 J1.2 | length 17.1
  Bottom Layer w1: H6.2 -47.244,32.385 -48.387,33.528 -48.387,38.989 -46.736,40.64 -45.339,40.64 -44.196,41.783 J1.2
NetH10_5: H10.5 R1.2 | length 42.3
  Top Layer w0.6: R1.2 11.475,-4.236 13.081,-5.842 17.653,-5.842 21.463,-2.032 29.972,-2.032 33.02,-5.08 v1(39.624,-5.08)
  Bottom Layer w0.6: v1(39.624,-5.08) 41.402,-5.08 43.307,-3.175 H10.5
NetH12_3: H12.3 M2.12 | length 17.3
  Bottom Layer w1: H12.3 -46.821,-39.92 -47.498,-39.243 -47.498,-35.306 -43.688,-31.496 M2.12
NetH12_4: H12.4 M2.11 | length 11.3
  Bottom Layer w1: H12.4 -44.069,-34.925 -41.148,-32.004 M2.11
NetH13_3: H13.3 M2.8 | length 17.1
  Bottom Layer w1: H13.3 -35.872,-39.767 -37.83,-39.767 -38.608,-38.989 -38.608,-35.306 -33.528,-30.226 M2.8
NetH13_4: H13.4 M2.7 | length 12.1
  Bottom Layer w1: H13.4 -35.719,-35.211 -30.988,-30.48 M2.7
NetH15_3: H15.3 M3.12 | length 20.2
  Bottom Layer w1: H15.3 -29.549,-39.92 -30.226,-39.243 -30.226,-36.703 -28.702,-35.179 -25.654,-35.179 -22.098,-31.623 M3.12
NetH15_4: H15.4 M3.11 | length 14.6
  Bottom Layer w1: H15.4 -25.188,-37.38 -19.558,-31.75 M3.11
NetH16_3: H16.3 M3.8 | length 21.3
  Bottom Layer w1: H16.3 -19.03,-39.908 -21.258,-39.908 -21.844,-39.322 -21.844,-36.576 -18.728,-33.46 -15.172,-33.46 -11.938,-30.226 M3.8
NetH16_4: H16.4 M3.7 | length 16
  Bottom Layer w1: H16.4 -15.663,-37.38 -9.398,-31.115 M3.7
NetH24_1: H24.1 R14.1 R15.1 | length 7
  Bottom Layer w2: R15.1 R14.1@-44.495,-5.498 ; R14.1@-45.085,-4.908 H24.1
NetQ1_1: Q1.1 R6.1 | length 7.7
  Bottom Layer w1: R6.1 10.287,-43.434 12.065,-45.212 Q1.1
NetU1_34: U1.34 U2.4 | length 51.1
  Top Layer w0.6: U1.34 -14.052,29.89 -11.43,32.512 -11.43,42.037 -6.159,47.308 -5.016,47.308 v1(-4.953,47.371)
  Bottom Layer w0.6: v1(-4.953,47.371) 3.81,47.371 13.671,37.51 U2.4
R_MOTOR_A: H2.5 U1.24 | length 11.5
  Bottom Layer w1: U1.24 -14.179,4.49 -9.906,8.763 H2.5
R_MOTOR_B: H2.4 U1.25 | length 11.5
  Bottom Layer w1: U1.25 -14.052,7.03 -9.779,11.303 H2.4
RPI_RELAY: D1.1 U1.9 | length 5.6
  Bottom Layer w1: D1.1 -37.664,25.726 -36.901,24.963 -35.043,24.963 U1.9
RST_A: S1.2 U1.30 | length 41.8
  Top Layer w0.6: v1(-10.033,18.161) -10.033,6.731 -3.048,-0.254 -1.452,-0.254 -0.599,-1.107 S1.2@-0.599,-3.12
  Top Layer w1: S1.2@-0.599,-11.105 S1.2@-0.599,-3.12
  Bottom Layer w0.6: U1.30 -13.634,19.73 -12.076,18.172 -10.044,18.172 v1(-10.033,18.161)
RST_B: S2.2 U2.30 | length 60.7
  Top Layer w1: S2.2@45.684,-17.962 45.684,-9.977 45.684,-7.529 48.768,-4.445 48.768,8.817 47.879,9.706 v1(47.879,9.779)
  Bottom Layer w1: U2.30 37.129,19.73 42.418,25.019 48.133,25.019 48.768,24.384 48.768,10.668 v1(47.879,9.779)
SPD_SEL_A: H10.3 U2.21 | length 13.4
  Bottom Layer w1: U2.21 37.256,-3.13 42.291,1.905 H10.3
SPD_SEL_B: H10.1 U2.22 | length 14.5
  Bottom Layer w1: U2.22 36.621,-0.59 44.076,6.865 46.108,6.865 H10.1
ULTRA_1_ECHO: M2.5 U3.8 | length 45.8
  Top Layer w0.6: v1(-37.846,-12.065) -19.05,-12.065 v1(-10.922,-3.937)
  Bottom Layer w0.6: M2.5 -41.148,-13.716 -39.497,-12.065 v1(-37.846,-12.065) ; v1(-10.922,-3.937) -9.779,-5.08 U3.8
ULTRA_1_TRIG: M2.6 U3.9 | length 51.2
  Top Layer w0.6: v1(-42.291,-12.065) -40.64,-13.716 -18.415,-13.716 -9.028,-4.329 -9.028,-2.805 v1(-9.017,-2.794)
  Bottom Layer w0.6: M2.6 -43.688,-13.462 v1(-42.291,-12.065) ; v1(-9.017,-2.794) -8.878,-2.794 -7.862,-3.81 U3.9
ULTRA_2_ECHO: M2.1 U3.6 | length 33
  Bottom Layer w0.6: M2.1 -30.988,-14.859 -23.749,-7.62 U3.6
ULTRA_2_TRIG: M2.2 U3.7 | length 35.9
  Bottom Layer w0.6: M2.2 -33.528,-15.113 -24.765,-6.35 U3.7
ULTRA_3_ECHO: M3.5 U3.4 | length 20.4
  Bottom Layer w0.6: M3.5 -19.558,-15.113 -14.605,-10.16 U3.4
ULTRA_3_TRIG: M3.6 U3.5 | length 23.5
  Bottom Layer w0.6: M3.6 -22.098,-14.986 -16.002,-8.89 U3.5
ULTRA_4_ECHO: M3.1 U3.2 | length 9.4
  Bottom Layer w0.6: M3.1 -9.398,-14.732 -7.366,-12.7 U3.2
ULTRA_4_TRIG: M3.2 U3.3 | length 12.5
  Bottom Layer w0.6: M3.2 -11.938,-14.605 -8.763,-11.43 U3.3
ULTRA_5: H14.3 U1.17 | length 80.9
  Top Layer w1: v1(-27.051,-16.51) -26.999,-16.562 -26.999,-19.102 -23.622,-22.479 -6.477,-22.479 -4.064,-24.892 -4.064,-30.48 v1(-8.255,-34.671) ; v1(-25.146,4.445) -23.368,4.445 -21.971,3.048 -21.971,-8.636 v1(-23.241,-9.906)
  Bottom Layer w1: U1.17 -34.867,4.467 -25.168,4.467 v1(-25.146,4.445) ; v1(-27.051,-16.51) -27.051,-13.716 v1(-23.241,-9.906) ; H14.3 -10.668,-37.084 v1(-8.255,-34.671)
pads on no net: M1.5 M1.6 M1.7 M1.8 U1.19 U1.20 U1.35 U1.36 U1.37 U1.40 U2.5 U2.6 U2.7 U2.9 U2.10 U2.11 U2.12 U2.20 U2.31 U2.32 U2.34 U2.35 U2.36 U2.37 U2.40

## Polygon pours and split planes (outlines as drawn)
GND on Bottom Layer "GND_L02_P001" (solid, remove dead copper, pour order 1): -50,50.038 50.038,50.038 50.038,-50 -50,-50
GND on Top Layer "GND_L01_P000" (solid, remove dead copper, pour order 0): -50,50.038 50.038,50.038 50.038,-50 -50,-50

## Other copper
Top Layer:
  rectangle net GND: 5.207,-46.305 8.001,-43.511
Bottom Layer:
  rectangle net GND: 5.207,-46.305 8.001,-43.511
  rectangle net +3v3: 0,-22.225 4.699,-19.05

## Silkscreen, mask and mechanical layers (free items; w line width, h text height)
Top Overlay:
  text "Pico A" at -28.702,1.754 h1.2
  text "Pico B" at 23.368,1.754 h1.2
  text "RST A" at -2.286,-9.271 h1.2 r90
  text "RST B" at 39.497,-16.383 h1.2 r90
  text "+3v3" at 1.397,-40.767 h1
  text "-" at 10.166,-45.339 h1.2 r90
  text "+5" at -3.429,-45.974 h1.2 r90
  text "Designed by Samyar Sadat Akhavi 2022" at -48.26,-48.622 h1.2
Bottom Overlay:
  lines w0.254: -41.91,-24.384 -7.747,-24.384 -7.747,-20.066 -41.91,-20.066 -41.91,-24.384
  text "github.com/samyarsadat/ROS-Robot" at 40.742,43.053 h1.6 r90
  text "The ROS Robot Project / Main Control Board" at 29.972,34.29 h1.6 r90
  text "Licensed under GPL-3.0" at 44.196,-18.288 h1.52
  text "Rev 1.2 - 13/10/2022" at 44.196,-21.372 h1.52
  text "Order ID:" at -9.271,-22.987 h1.7
Mechanical 1:
  the board outline again, w0.3

## Text inside footprints (layer, text, board x,y; h text height)
H1: Top Overlay "R" at 31.694,-14.468 h0.5
H4: Top Overlay "R" at 25.64,-14.468 h0.5
H8: Top Overlay "R" at 19.587,-14.468 h0.5
H11: Top Overlay "R" at 13.533,-14.468 h0.5
M1: Top Overlay "MPU6050" at 3.053,30.4 h3 r90; Top Overlay "1" at -2.642,44.484 h1.2
M2: Top Overlay "7" at -31.584,-23.779 h1.2 r270; Top Overlay "1" at -31.584,-19.879 h1.2 r270
M3: Top Overlay "1" at -9.994,-19.904 h1.2 r270; Top Overlay "7" at -9.994,-23.804 h1.2 r270
U1: Top Overlay "1" at -32.071,44.529 h1.2; Top Overlay "40" at -21.796,44.529 h1.2; Top Overlay "USB" at -25.2,41.85 h2.5 r90
U2: Top Overlay "USB" at 26.8,41.85 h2.5 r90; Top Overlay "40" at 30.204,44.529 h1.2; Top Overlay "1" at 19.929,44.529 h1.2
U3: Bottom Overlay "15" at 3.401,-3.485 h1 r180; Bottom Overlay "/EN" at 2.876,-2.31 h1 r180; Bottom Overlay "ADD2" at 2.401,-1.01 h0.8 r180; Bottom Overlay "ADD3" at 2.401,0.215 h0.8 r180; Bottom Overlay "14" at 3.426,-4.835 h1 r180; Bottom Overlay "13" at 3.451,-6.085 h1 r180; Bottom Overlay "12" at 3.501,-7.435 h1 r180; Bottom Overlay "11" at 3.501,-8.71 h1 r180; Bottom Overlay "10" at 3.476,-9.91 h1 r180; Bottom Overlay "9" at 3.801,-11.185 h1 r180; Bottom Overlay "8" at 3.826,-12.535 h1 r180; Bottom Overlay "VCC" at 2.501,-13.735 h1 r180; Bottom Overlay "7" at -0.849,-12.375 h1 r180; Bottom Overlay "6" at -0.849,-11.105 h1 r180; Bottom Overlay "5" at -0.849,-9.835 h1 r180; Bottom Overlay "4" at -0.849,-8.565 h1 r180; Bottom Overlay "3" at -0.849,-7.295 h1 r180; Bottom Overlay "2" at -0.849,-6.025 h1 r180; Bottom Overlay "1" at -0.849,-4.755 h1 r180; Bottom Overlay "0" at -0.849,-3.485 h1 r180; Bottom Overlay "ADD0" at -0.849,-2.215 h0.8 r180; Bottom Overlay "ADD1" at -0.849,-0.945 h0.8 r180; Bottom Overlay "GND" at -0.849,0.325 h1 r180; Bottom Overlay "OUT" at -0.849,-13.645 h1 r180